# Altium PCB NB05.PcbDoc
Units mil, origin at the board's own origin, x right, y up, seen from the top; angles counter-clockwise.
Board outline 6000 x 4000 mil, 2 copper layers (Top Layer, Bottom Layer); 1 components, 0 nets, 42 pads, 0 vias.
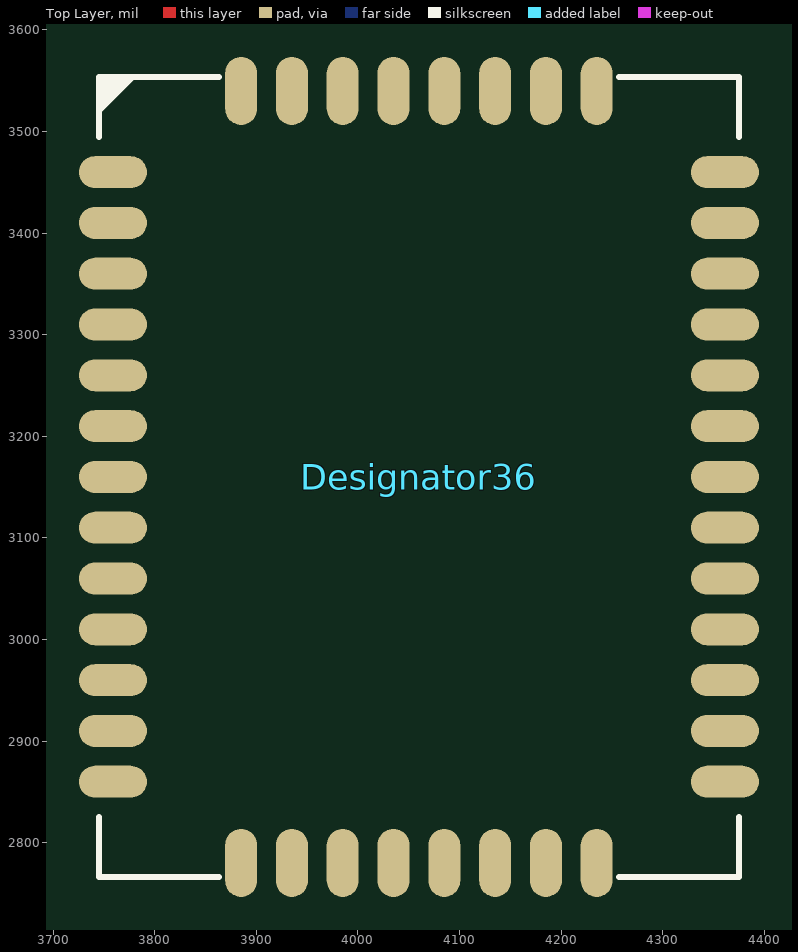
[diagram p0: Top Layer view]
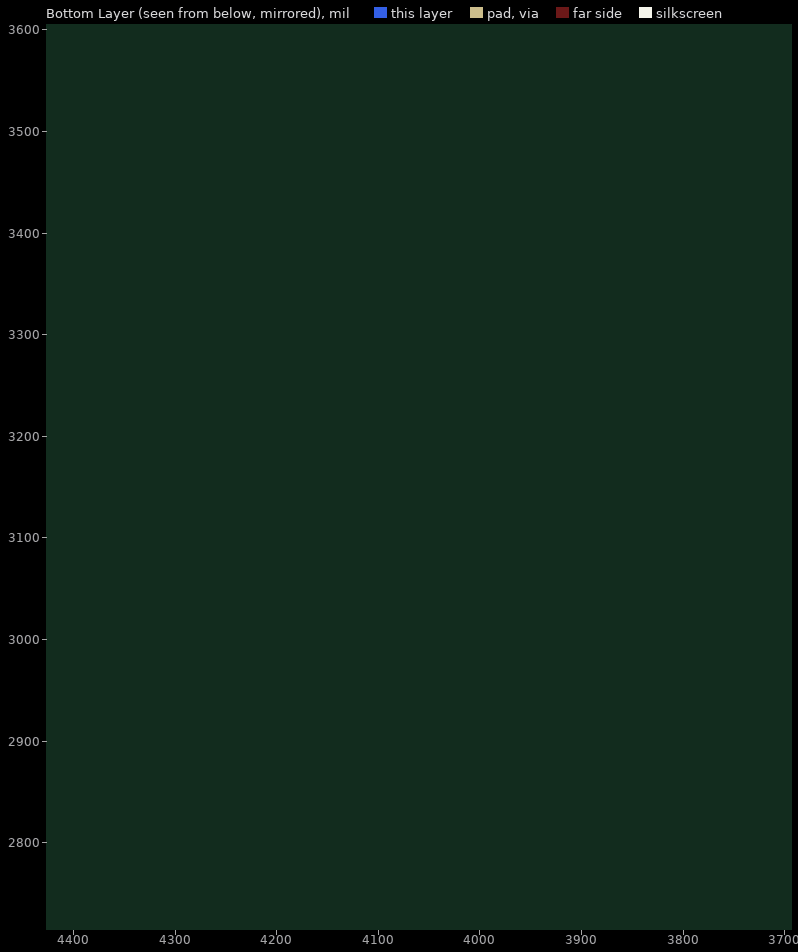
[diagram p1: Bottom Layer view, seen from below]

## Layer stack, top to bottom
Top Layer: signal copper 1.4
Dielectric: dielectric 12.6, FR-4, Dk 4.8
Bottom Layer: signal copper 1.4

## Board outline
1000,1000 7000,1000 7000,5000 1000,5000

## Design rules (kind name [scope] priority, off if disabled: settings)
Clearance [All] p1: gap=10
PolygonConnect [All] p1: connectstyle=Relief reliefconductorwidth=10 reliefentries=4 polygonreliefangle="90 Angle"
RoutingVias [All] p1: holewidth=28 width=50 viastyle="Through Hole" minholewidth=28 minwidth=50 maxholewidth=28 maxwidth=50
SilkscreenOverComponentPads [All] p1: minsilkscreentomaskgap=10
SolderMaskExpansion [All] p1: expansion=4
TestPointUsage [All] p1: valid=0 allowmultiple=FALSE
Testpoint [All] p1: side=15 testpointundercomponent=TRUE minsize=40 maxsize=100 preferedsize=60 minholesize=0 maxholesize=40 preferedholesize=32 testpointgrid=1 style=1023 order=0123456789
Width [All] p1: maxlimit=10 minlimit=10 preferedwidth=10
23 further rules are at their usual default settings.

## Components (designator, comment, footprint, x,y, rotation, side; value= is the part's Value field where it differs from the comment)
Designator36 "Comment" NB05-SMD 4060,3160 r0 top

## Footprints (in the part's own frame and the unit in brackets; to place one, negate y for a bottom-side part, rotate by r counter-clockwise, add the part's x,y. Pads: shape width x height; smd on the part's side, far side on the other; paste and mask are expansions set on the pad)
NB05-SMD [mm]
  oval 1.7x0.8 smd: 1(-7.65,7.62) 2(-7.65,6.35) 3(-7.65,5.08) 4(-7.65,3.81) 5(-7.65,2.54) 6(-7.65,1.27) 7(-7.65,0) 8(-7.65,-1.27) 9(-7.65,-2.54) 10(-7.65,-3.81) 11(-7.65,-5.08) 12(-7.65,-6.35) 13(-7.65,-7.62) 22(7.65,-7.62) 23(7.65,-6.35) 24(7.65,-5.08) 25(7.65,-3.81) 26(7.65,-2.54) 27(7.65,-1.27) 28(7.65,0) 29(7.65,1.27) 30(7.65,2.54) 31(7.65,3.81) 32(7.65,5.08) 33(7.65,6.35) 34(7.65,7.62)
  oval 0.8x1.7 smd: 14(-4.445,-9.65) 15(-3.175,-9.65) 16(-1.905,-9.65) 17(-0.635,-9.65) 18(0.635,-9.65) 19(1.905,-9.65) 20(3.175,-9.65) 21(4.445,-9.65) 35(4.445,9.65) 36(3.175,9.65) 37(1.905,9.65) 38(0.635,9.65) 39(-0.635,9.65) 40(-1.905,9.65) 41(-3.175,9.65) 42(-4.445,9.65)
  silkscreen extent -8,-10 8,10

## Nets (pads, with @x,y where several pads share a name; then routed paths per layer and width w, separated by ;. In a path a pad name is that pad's centre, name@x,y a point inside that pad or via, vN(x,y) a via of type N, cw(c..) or ccw(c..) an arc to the next point about the centre after c; other vN are vias at no path point)
pads on no net: Designator36.1 Designator36.2 Designator36.3 Designator36.4 Designator36.5 Designator36.6 Designator36.7 Designator36.8 Designator36.9 Designator36.10 Designator36.11 Designator36.12 Designator36.13 Designator36.14 Designator36.15 Designator36.16 Designator36.17 Designator36.18 Designator36.19 Designator36.20 Designator36.21 Designator36.22 Designator36.23 Designator36.24 Designator36.25 Designator36.26 Designator36.27 Designator36.28 Designator36.29 Designator36.30 Designator36.31 Designator36.32 Designator36.33 Designator36.34 Designator36.35 Designator36.36 Designator36.37 Designator36.38 Designator36.39 Designator36.40 Designator36.41 Designator36.42